# Altium PCB MAX3738ETG+ MB.PcbDoc
Units mm, origin at the board's own origin, x right, y up, seen from the top; angles counter-clockwise.
Board outline 150 x 150 mm, 2 copper layers (Top Layer, Bottom Layer); 32 components, 21 nets, 189 pads, 0 vias.
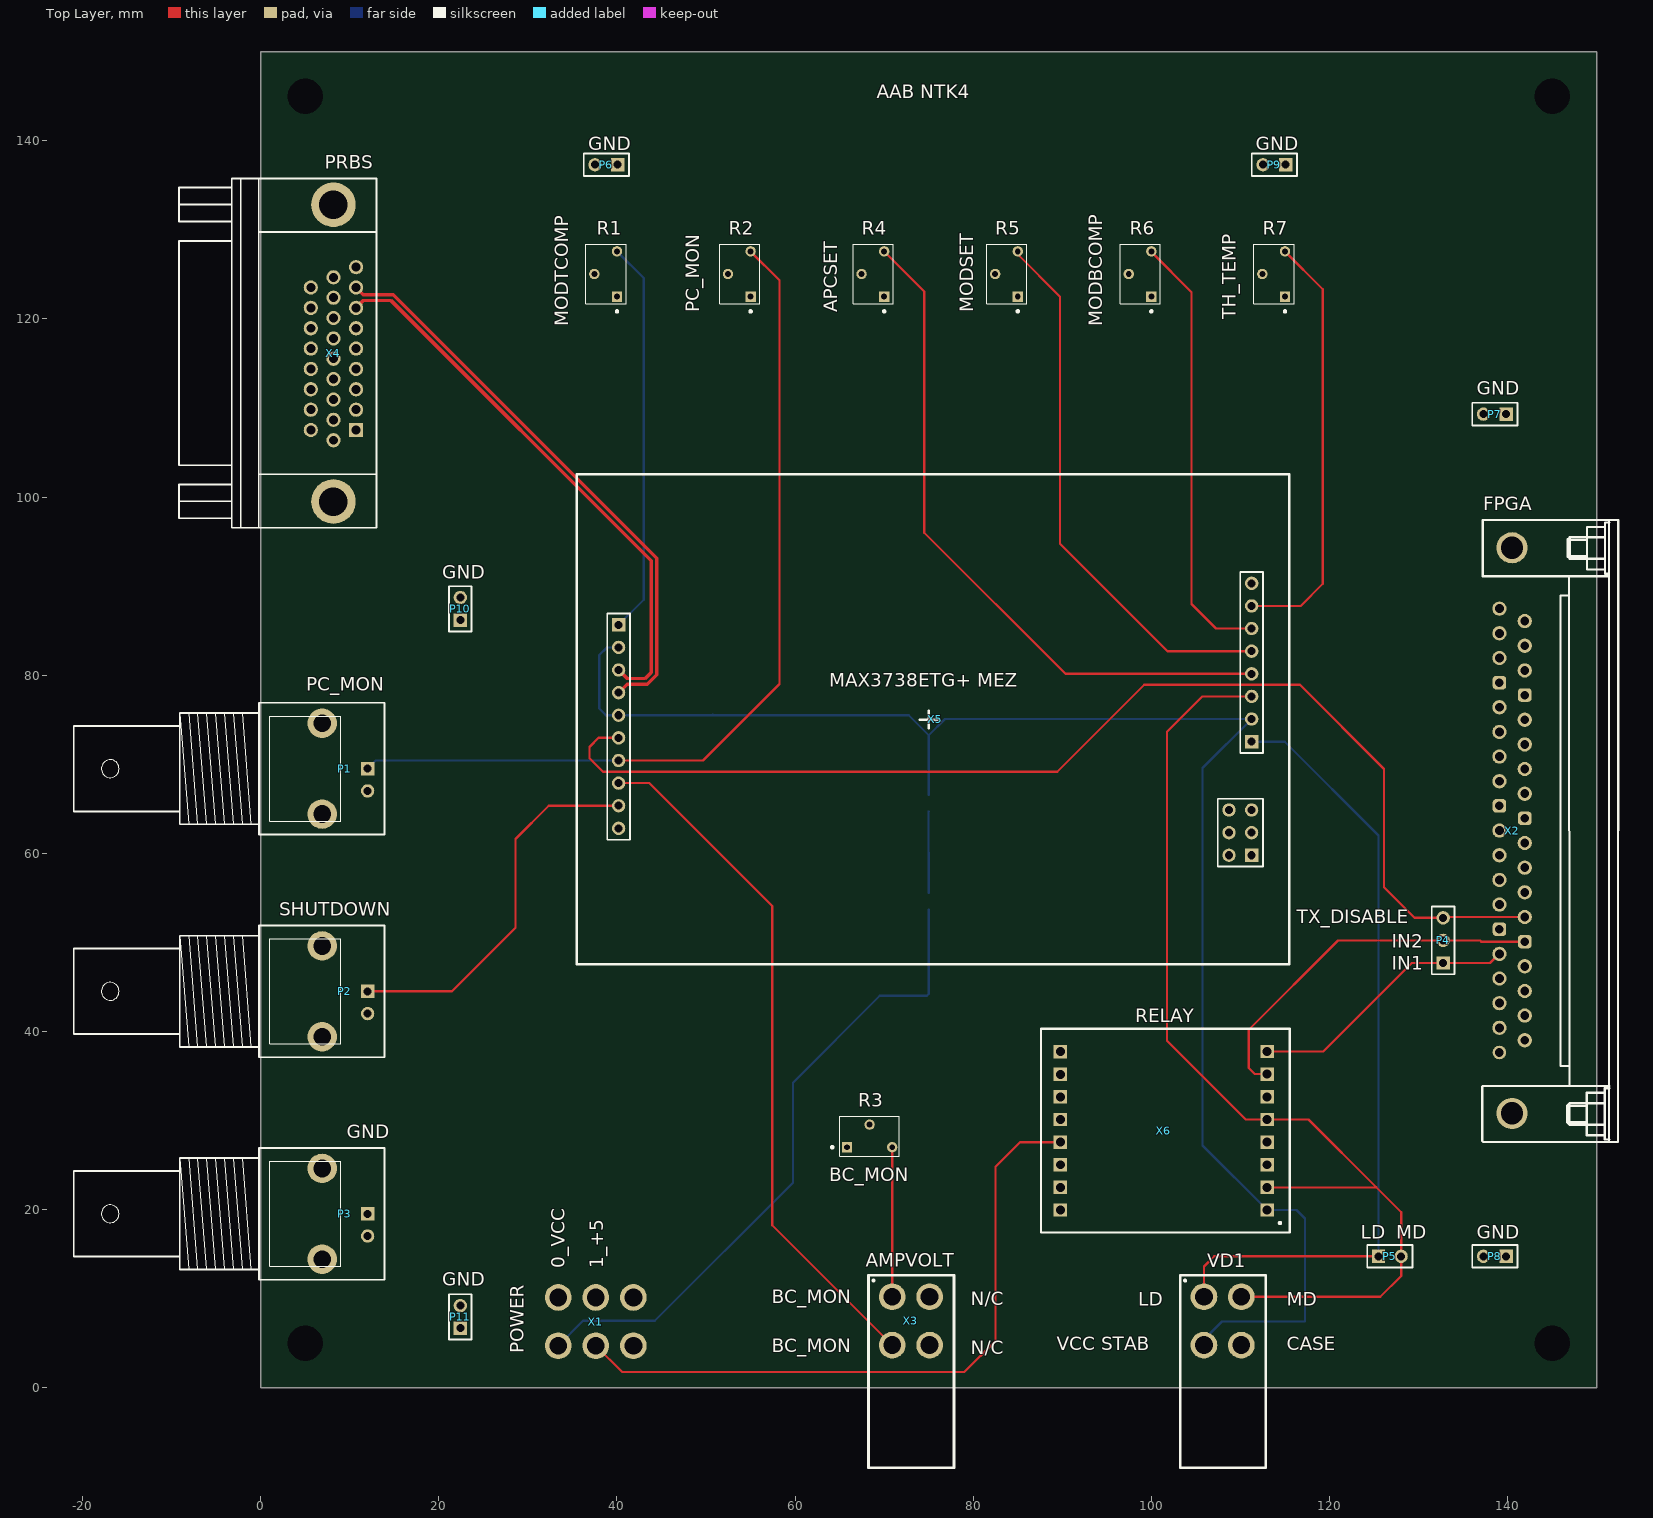
[diagram p0: Top Layer view]
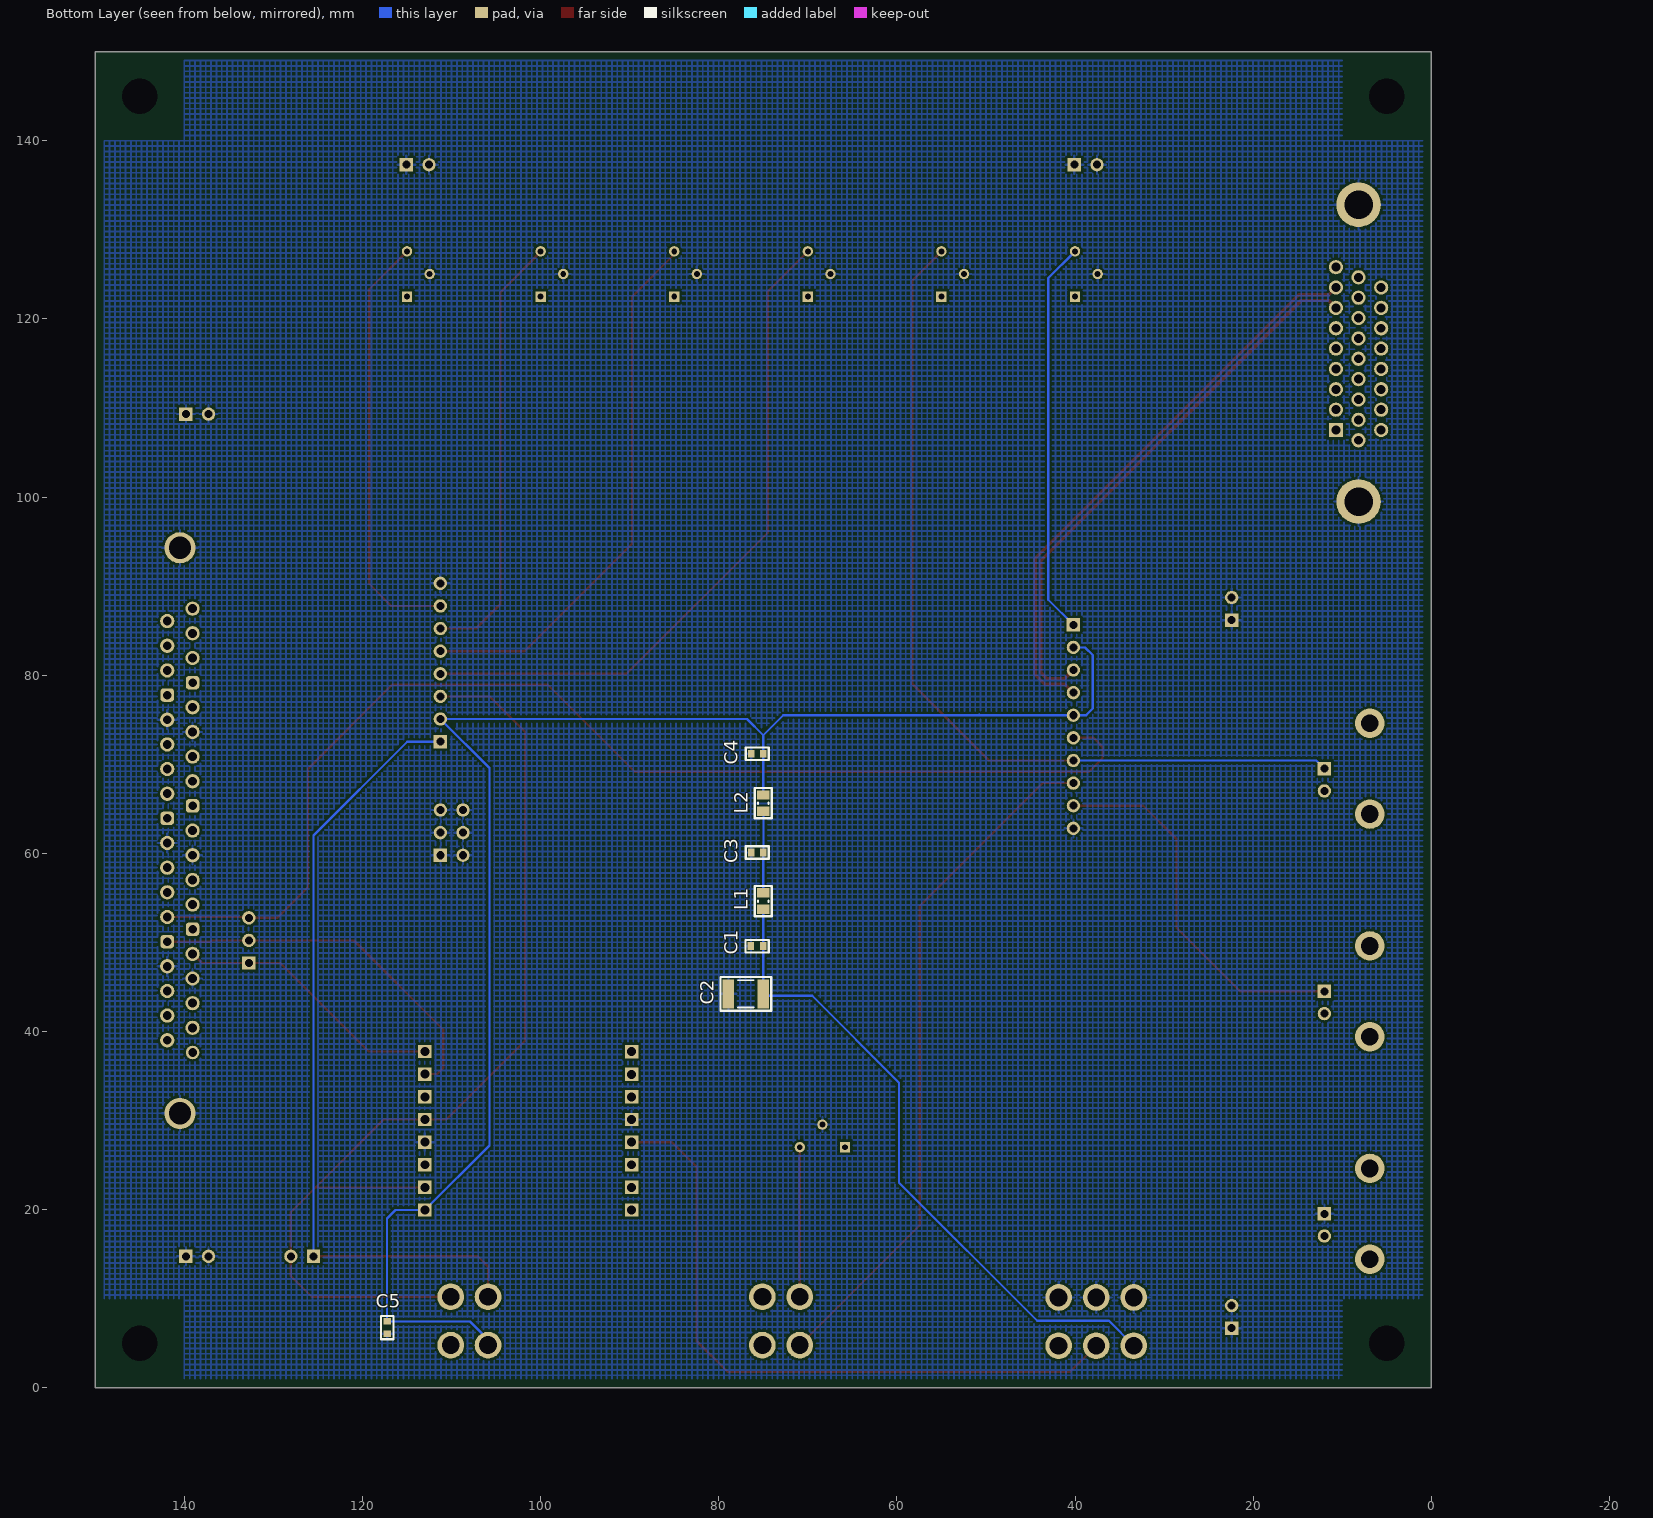
[diagram p1: Bottom Layer view, seen from below]

## Layer stack, top to bottom
Top Solder: solder mask 0.0102, Solder Resist, Dk 3.5
Top Layer: signal copper 0.0356
Dielectric 1: dielectric 0.32, FR-4, Dk 4.8
Bottom Layer: signal copper 0.0356
Bottom Solder: solder mask 0.0102, Solder Resist, Dk 3.5

## Board outline
0,0 150,0 150,150 0,150

## Design rules (kind name [scope] priority, off if disabled: settings)
Clearance [All] p1: gap=0.254 ignorepadtopadclearanceinfootprint=FALSE except(0: Arc-Hole Track-Hole SMDPad-Hole THPad-Hole Via-Hole Fill-Hole Poly-Hole Region-Hole Text-Hole)
DiffPairsRouting [All] p1: maxlimit=0.254 minlimit=0.254 mostfreqgap=0.254 toplayer_minwidth=0.381 toplayer_maxwidth=0.381 toplayer_prefwidth=0.381 bottomlayer_minwidth=0.381 bottomlayer_maxwidth=0.381 bottomlayer_prefwidth=0.381 maxuncoupledlength=12.7
HoleSize [All] p1: absolutevalues=TRUE maxlimit=4 minlimit=0.4 maxpercent=80.000 minpercent=20.000
PolygonConnect [All] p1: connectstyle=Relief reliefconductorwidth=0.254 reliefentries=4 polygonreliefangle="90 Angle" airgapwidth=0.254
RoutingVias [All] p1: holewidth=0.4 width=1.27 viastyle="Through Hole" minholewidth=0.4 minwidth=0.8 maxholewidth=4 maxwidth=6
SilkToSilkClearance [All] p1: silktosilkclearance=0.127
SilkToSolderMaskClearance [IsPad] p1: minsilkscreentomaskgap=0.127 clearancetoexposedcopper=TRUE
SolderMaskExpansion [All] p1: expansion=0.102
UnRoutedNet [All] p1: checkbadconnections=TRUE
Width [All] p1: maxlimit=0.254 minlimit=0.254 preferedwidth=0.254
25 further rules are at their usual default settings.

## Classes and differential pairs
differential pair PRBS: +PRBS_P -PRBS_N

## Components (designator, comment, footprint, x,y, rotation, side; value= is the part's Value field where it differs from the comment)
C1 "0,1uF_0603" CAP_0603 75.7,49.573 r180 bottom
C2 "10uF_1812" CAP_1812 76.96,44.217 r180 bottom
C3 "0,1uF_0603" CAP_0603 75.675,60.098 r180 bottom
C4 "0,1uF_0603" CAP_0603 75.675,71.173 r180 bottom
C5 "0,01uF_0603" CAP_0603 117.223,6.75 r90 bottom
L1 "4,7uH" IND_0805 75.002,54.625 r90 bottom
L2 "4,7uH" IND_0805 75.002,65.625 r90 bottom
P1 "BNC" "BNC_RA CON" 12,69.5 r0 top
P2 "BNC" "BNC_RA CON" 12,44.5 r0 top
P3 "BNC" "BNC_RA CON" 12,19.525 r0 top
P4 "Header 3" HDR1X3 132.759,47.676 r90 top
P5 "Header 2" HDR1X2 125.5,14.75 r0 top
P6 "Header 2" HDR1X2 40.074,137.31 r180 top
P7 "Header 2" HDR1X2 139.824,109.309 r180 top
P8 "Header 2" HDR1X2 139.824,14.75 r180 top
P9 "Header 2" HDR1X2 115.074,137.31 r180 top
P10 "Header 2" HDR1X2 22.409,86.176 r90 top
P11 "Header 2" HDR1X2 22.409,6.676 r90 top
R1 "RES 3266W" "RES 3266W" 40,122.5 r90 top
R2 "RES 3266W" "RES 3266W" 55,122.5 r90 top
R3 "RES 3266W" "RES 3266W" 65.82,27 r0 top
R4 "RES 3266W" "RES 3266W" 70,122.5 r90 top
R5 "RES 3266W" "RES 3266W" 85,122.5 r90 top
R6 "RES 3266W" "RES 3266W" 100,122.5 r90 top
R7 "RES 3266W" "RES 3266W" 115,122.5 r90 top
VD1 "LD with MD" AMP_VOLTMETER 105.9,10.2 r0 top
X1 "POWER" POWER 41.84,10.135 r180 top
X2 "CHEAP_CON_37_FEMALE" CHEAP_CONN_FEMALE 140.5,94.3 r270 top
X3 "AMPVOLT" AMP_VOLTMETER 70.9,10.2 r0 top
X4 "DHR-26F" DHR-26F 8.167,132.82 r180 top
X5 "MAX3738ETG+ MEZ" "MAX3738ETG+ MEZ" 75,75 r0 top
X6 "RELAY" RELAY_MODULE 113,37.75 r180 top

## Footprints (in the part's own frame and the unit in brackets; to place one, negate y for a bottom-side part, rotate by r counter-clockwise, add the part's x,y. Pads: shape width x height; smd on the part's side, far side on the other; paste and mask are expansions set on the pad)
AMP_VOLTMETER [mm] "AMP_VOLTMETER"
  round 3 hole 2: 1(0,0) 2(0,-5.423) 3(4.2,-5.423) 4(4.2,0)
  silkscreen extent -2.66,-19.17 6.94,2.42
"BNC_RA CON" [mm] "Connector; BNC Elbow"
  rect 1.5x1.5 hole 0.9: 1(0,0)
  round 3.3 hole 2: 2(-5.1,-5.1) 2(-5.1,5.1)
  round 1.5 hole 0.9: 2(0,-2.5)
  silkscreen extent -33,-7.4 1.9,7.4
CAP_0603 [mm]
  rect 0.72x0.88 smd: 1(-0.69,0) 2(0.69,0)
  silkscreen extent -1.3,-0.7 1.3,0.7, body extent -0.8,-0.4 0.8,0.4, height 0.9
CAP_1812 [mm]
  rect 1.3x3.25 smd: 1(-1.95,0) 2(1.95,0)
  silkscreen extent -2.85,-1.9 2.85,1.9, body extent -2.25,-1.6 2.25,1.6, height 2
CHEAP_CONN_FEMALE [mm] "CHEAP_CONN_FEMALE"
  round 1.6 hole 1: 1(6.833,-1.422) 2(9.601,-1.422) 3(12.37,-1.422) 5(17.907,-1.422) 6(20.676,-1.422) 7(23.444,-1.422) 8(26.213,-1.422) 10(31.75,-1.422) 11(34.519,-1.422) 12(37.287,-1.422) 13(40.056,-1.422) 15(45.593,-1.422) 16(48.362,-1.422) 17(51.13,-1.422) 18(53.899,-1.422) 20(8.23,1.422) 21(10.998,1.422) 22(13.767,1.422) 24(19.304,1.422) 25(22.073,1.422) 26(24.841,1.422) 27(27.61,1.422) 29(33.147,1.422) 30(35.916,1.422) 31(38.684,1.422) 32(41.453,1.422) 34(46.99,1.422) 35(49.759,1.422) 36(52.527,1.422) 37(55.296,1.422)
  rrect50% 1.524x1.524 hole 0.965: 4(15.138,-1.422) 9(28.981,-1.422) 14(42.824,-1.422) 23(16.535,1.422) 28(30.378,1.422) 33(44.221,1.422)
  round 1.524 hole 0.965: 19(56.667,-1.422)
  round 3.5 hole 2.5: 38(0,0) 39(63.5,0)
  silkscreen extent -3.11,-3.36 66.72,11.92
DHR-26F [mm]
  rect 1.6x1.6 hole 1: 1(-2.54,25.298)
  round 1.6 hole 1: 2(-2.54,23.012) 3(-2.54,20.726) 4(-2.54,18.44) 5(-2.54,16.154) 6(-2.54,13.868) 7(-2.54,11.582) 8(-2.54,9.296) 9(-2.54,7.01) 10(0,26.441) 11(0,24.155) 12(0,21.869) 13(0,19.583) 14(0,17.297) 15(0,15.011) 16(0,12.725) 17(0,10.439) 18(0,8.153) 19(2.54,25.298) 20(2.54,23.012) 21(2.54,20.726) 22(2.54,18.44) 23(2.54,16.154) 24(2.54,13.868) 25(2.54,11.582) 26(2.54,9.296)
  round 5 hole 3.2: 27(0,0) 28(0,33.325)
  silkscreen extent -4.83,-2.94 17.33,36.26, body extent -3.81,-2.94 17.59,36.2, height 12.47
HDR1X2 [mm] "Connector; Header; 2 Position"
  rect 1.5x1.5 hole 0.9: 1(0,0)
  round 1.5 hole 0.9: 2(2.54,0)
  silkscreen extent -1.27,-1.27 3.81,1.27
HDR1X3 [mm] "Connector; Header; 3 Position"
  rect 1.5x1.5 hole 0.9: 1(0,0)
  round 1.5 hole 0.9: 2(2.54,0) 3(5.08,0)
  silkscreen extent -1.27,-1.27 6.35,1.27
IND_0805 [mm]
  rect 1.05x1.4 smd: 1(-0.925,0) 2(0.925,0)
  silkscreen extent -1.7,-0.95 1.7,0.95, body extent -1.1,-0.7 1.1,0.7, height 1
"MAX3738ETG+ MEZ" [mm]
  rect 1.5x1.5 hole 0.9: 1(-34.818,10.658) 11(36.255,-2.468) 19(36.254,-15.221)
  round 1.5 hole 0.9: 2(-34.818,8.118) 3(-34.818,5.578) 4(-34.818,3.038) 5(-34.818,0.498) 6(-34.818,-2.042) 7(-34.818,-4.582) 8(-34.818,-7.122) 9(-34.818,-9.662) 10(-34.818,-12.202) 12(36.255,0.072) 13(36.255,2.612) 14(36.255,5.152) 15(36.255,7.692) 16(36.255,10.232) 17(36.255,12.772) 18(36.255,15.312) 20(36.254,-12.681) 21(36.254,-10.141) 22(33.714,-15.221) 23(33.714,-12.681) 24(33.714,-10.141)
  silkscreen extent -39.52,-27.46 40.48,27.54
POWER [mm] "POWER"
  round 3 hole 2: 1(8.435,5.422) 2(4.217,5.422) 3(0,5.422) 4(8.435,0) 5(4.217,0) 6(0,0)
RELAY_MODULE [mm]
  rect 1.5x1.5 hole 1: 1(0,17.805) 2(0,15.265) 3(0,12.725) 4(0,10.185) 5(0,7.645) 6(0,5.105) 7(0,2.54) 8(0,0) 9(23.216,0.025) 10(23.216,2.565) 11(23.216,5.105) 12(23.216,7.645) 13(23.216,10.185) 14(23.216,12.725) 15(23.216,15.265) 16(23.216,17.805)
  silkscreen extent -2.54,-2.54 25.4,20.32
"RES 3266W" [mm]
  rect 1.168x1.168 hole 0.66: 1(0,0)
  round 1.168 hole 0.66: 2(2.54,2.54) 3(5.08,0)
  silkscreen extent -1.76,-1.02 5.89,3.48, body extent -0.81,-1.02 5.9,3.48, height 8.77

## Part data
C1 C2 C3 C4 C5: library part CAP
L1 L2: library part IND
P1 P2 P3: "BNC Elbow Connector", LatestRevisionDate=17-Jul-2002, LatestRevisionNote="Re-released for DXP Platform.", Publisher="Altium Limited"
P4: "Header, 3-Pin", LatestRevisionDate=17-Jul-2002, LatestRevisionNote="Re-released for DXP Platform.", Publisher="Altium Limited"
P5 P6 P7 P8 P9 P10 P11: "Header, 2-Pin", LatestRevisionDate=17-Jul-2002, LatestRevisionNote="Re-released for DXP Platform.", Publisher="Altium Limited"
X3: library part AMP_VOLTMETER
X6: library part MEZON_RELAY

## Free pads (board coordinates)
  round 3 hole 4 unplated: 0(5,145) 0(5,5) 0(145,5) 0(145,145)

## Nets (pads, with @x,y where several pads share a name; then routed paths per layer and width w, separated by ;. In a path a pad name is that pad's centre, name@x,y a point inside that pad or via, vN(x,y) a via of type N, cw(c..) or ccw(c..) an arc to the next point about the centre after c; other vN are vias at no path point)
+5: X1.2 X6.13 | length 75.5
  Top Layer w0.254: X1.2 40.585,1.75 79,1.75 82.5,5.25 82.5,24.814 85.25,27.564 X6.13
APCSET: R4.3 X5.14 | length 76.8
  Top Layer w0.254: R4.3 74.5,123.08 74.5,96 90.348,80.152 X5.14
BC_MON: X3.2 X5.8 | length 77.8
  Top Layer w0.254: X5.8 43.622,67.878 57.427,54.073 57.427,18.25 X3.2
GND: C1.1 C2.1 C3.1 C4.1 C5.1 P3.1 P6.1 P6.2 P7.1 P7.2 P8.1 P8.2 P9.1 P9.2 P10.1 P10.2 P11.1 P11.2 R1.2 R2.2 R3.2 R4.2 R5.2 R6.2 R7.2 X1.4 X1.5 X1.6 X2.6 X2.11 X2.16 X2.24 X2.29 X2.34 X2.38 X2.39 X4.27 X4.28 X5.10 X5.18 X5.19 X5.20 X5.21 X5.22 X5.23 X5.24 X6.4 X6.12
IN1: P4.1 X2.15 X6.8 | length 30.6
  Top Layer w0.254: X6.8 119.3,37.75 129.226,47.676 P4.1 138.026,47.676 139.057,48.707 X2.15
IN2: P4.2 X2.33 X6.7 | length 41.9
  Top Layer w0.254: X6.7 111.6,35.21 110.925,35.885 110.925,40.175 120.966,50.216 P4.2 136.909,50.216 137.046,50.079 X2.33
LD: P5.1 VD1.1 X5.11 | length 89.3
  Top Layer w0.254: VD1.1 105.9,13.6 107.05,14.75 120,14.75 ; 120,14.75 P5.1
  Bottom Layer w0.254: X5.11 114.968,72.532 125.5,62 P5.1
MD: P5.2 VD1.4 X5.13 X6.2 X6.5 | length 118.4
  Top Layer w0.254: VD1.4 125.7,10.2 128.04,12.54 P5.2 128.04,19.71 125.25,22.5 ; X5.13 105.712,77.612 101.75,73.65 101.75,38.958 110.604,30.104 X6.5 117.646,30.104 125.25,22.5 ; X6.2 125.234,22.484 125.25,22.5
MODBCOMP: R6.3 X5.16 | length 49.3
  Top Layer w0.254: R6.3 100,127.5 104.5,123 104.5,88 107.268,85.232 X5.16
MODSET: R5.3 X5.15 | length 61.3
  Top Layer w0.254: R5.3 85,127.25 89.75,122.5 89.75,94.75 101.808,82.692 X5.15
MODTCOMP: R1.3 X5.1 | length 44.3
  Bottom Layer w0.254: R1.3 43,124.58 43,88.476 X5.1
NetC3_2: C3.2 L1.2 L2.1 | length 9.2
  Bottom Layer w0.254: L1.2 75.002,60.081 C3.2 74.985,64.683 L2.1
NetR3_3: R3.3 X3.1 | length 16.8
  Top Layer w0.254: X3.1 R3.3
PC_MON: P1.1 R2.3 X5.7 | length 100.1
  Top Layer w0.254: X5.7 49.668,70.418 58.25,79 58.25,124.33 R2.3
  Bottom Layer w0.254: P1.1 12.918,70.418 X5.7
PRBS_N: X4.8 X5.4 | length 64.5
  Top Layer w0.381: X4.8 11.532,122.698 14.888,122.698 44.46,93.127 44.46,80.037 43.413,78.99 41.134,78.99 X5.4
PRBS_P: X4.7 X5.3 | length 62.4
  Top Layer w0.381: X4.7 11.532,122.063 14.625,122.063 43.825,92.863 43.825,80.3 43.15,79.625 41.134,79.625 X5.3
SHUTDOWN: P2.1 X5.9 | length 42.7
  Top Layer w0.254: P2.1 21.475,44.5 28.6,51.625 28.6,61.6 32.338,65.338 X5.9
TH_TEMP: R7.3 X5.17 | length 48.1
  Top Layer w0.254: X5.17 116.772,87.772 119.25,90.25 119.25,123.33 R7.3
TX_DISABLE: P4.3 X2.32 X5.6 | length 133.3
  Top Layer w0.254: X5.6 37.933,72.958 36.9,71.925 36.9,70.675 38.425,69.15 89.425,69.15 99.2,78.925 116.675,78.925 126.125,69.475 126.125,56.175 129.544,52.756 P4.3 132.85,52.847 X2.32
VCC: C1.2 C2.2 L1.1 X1.1 | length 74
  Bottom Layer w0.254: X1.1 36.192,7.5 44.25,7.5 59.75,23 59.75,34.25 69.5,44 74.793,44 C2.2 C1.2 75.01,53.692 L1.1
"VCC STAB": C4.2 C5.2 L2.2 VD1.2 X5.2 X5.5 X5.12 X6.1 | length 179.9
  Bottom Layer w0.254: X5.2 38.868,83.118 38,82.25 38,76.25 38.752,75.498 X5.5 50.75,75.498 ; 50.75,75.55 50.75,75.498 ; L2.2 75.002,73.252 ; VD1.2 105.9,5.4 107.94,7.44 C5.2 ; C5.2@117.25,7.44 117.25,19 116.306,19.944 X6.1 105.75,27.194 105.75,69.567 X5.12 76.822,75.072 75.002,73.252 ; 50.75,75.498 72.756,75.498 75.002,73.252
pads on no net: P1.2 P2.2 P3.2 R1.1 R2.1 R3.1 R4.1 R5.1 R6.1 R7.1 VD1.3 X1.3 X2.1 X2.2 X2.3 X2.4 X2.5 X2.7 X2.8 X2.9 X2.10 X2.12 X2.13 X2.14 X2.17 X2.18 X2.19 X2.20 X2.21 X2.22 X2.23 X2.25 X2.26 X2.27 X2.28 X2.30 X2.31 X2.35 X2.36 X2.37 X3.3 X3.4 X4.1 X4.2 X4.3 X4.4 X4.5 X4.6 X4.9 X4.10 X4.11 X4.12 X4.13 X4.14 X4.15 X4.16 X4.17 X4.18 X4.19 X4.20 X4.21 X4.22 X4.23 X4.24 X4.25 X4.26 X6.3 X6.6 X6.9 X6.10 X6.11 X6.14 X6.15 X6.16

## Polygon pours and split planes (outlines as drawn)
GND on Bottom Layer "GND_L02_P062" (hatched 90Degree grid 0.6 track 0.2, pour order 62): 10,140 10,149 140,149 140,140 149,140 149,10 140,10 140,1 10,1 10,10 1,10 1,140
GND on Bottom Layer "GND_L02_P054" (hatched 90Degree grid 0.75 track 0.254, remove dead copper, pour order 54): 10,140
GND on Bottom Layer "GND_L02_P048" (hatched 90Degree grid 0.75 track 0.254, remove dead copper, pour order 48): 7.5,140
GND on Bottom Layer "GND_L02_P044" (hatched 90Degree grid 0.75 track 0.254, remove dead copper, pour order 44): 10,140
GND on Bottom Layer "GND_L02_P042" (hatched 90Degree grid 0.75 track 0.254, remove dead copper, pour order 42): 7.5,140
VCC on Bottom Layer "VCC_L02_P034" (hatched 90Degree grid 0.75 track 0.254, remove dead copper, pour order 34): 125,163
VCC on Bottom Layer "VCC_L02_P030" (hatched 90Degree grid 0.75 track 0.254, remove dead copper, pour order 30): 7.5,140
GND on Bottom Layer "GND_L02_P026" (hatched 90Degree grid 0.75 track 0.254, remove dead copper, pour order 26): 2.5,10
GND on Bottom Layer "GND_L02_P022" (hatched 90Degree grid 0.75 track 0.254, remove dead copper, pour order 22): 2.5,140
GND on Bottom Layer "GND_L02_P000" (hatched 90Degree grid 0.6 track 0.2, pour order 0): 0,150

## Silkscreen, mask and mechanical layers (free items; w line width, h text height)
Top Overlay:
  text "AAB NTK4" at 69.162,144.8 h1.52
  text "GND" at 36.758,138.95 h1.52
  text "GND" at 111.708,138.95 h1.52
  text "PRBS" at 7.175,136.876 h1.52
  text "PC_MON" at 49.25,120.723 h1.52 r90
  text "APCSET" at 64.75,120.723 h1.52 r90
  text "MODSET" at 80,120.723 h1.52 r90
  text "TH_TEMP" at 109.5,119.962 h1.52 r90
  text "MODTCOMP" at 34.5,119.2 h1.52 r90
  text "MODBCOMP" at 94.5,119.2 h1.52 r90
  text "GND" at 136.527,111.5 h1.52
  text "FPGA" at 137.267,98.5 h1.52
  text "GND" at 20.383,90.8 h1.52
  text "PC_MON" at 5.113,78.25 h1.52
  text "SHUTDOWN" at 2.066,53 h1.52
  text "TX_DISABLE" at 116.3,52.15 h1.52
  text "IN2" at 126.965,49.398 h1.52
  text "IN1" at 126.965,46.9 h1.52
  text "GND" at 9.683,28.025 h1.52
  text "BC_MON" at 63.85,23.2 h1.52
  text "LD" at 123.491,16.725 h1.52
  text "MD" at 127.491,16.725 h1.52
  text "GND" at 136.527,16.725 h1.52
  text "0_VCC" at 34.14,13.4 h1.52 r90
  text "1_+5" at 38.44,13.4 h1.52 r90
  text "GND" at 20.383,11.425 h1.52
  text "BC_MON" at 57.4,9.5 h1.52
  text "N/C" at 79.7,9.246 h1.52
  text "LD" at 98.541,9.2 h1.52
  text "MD" at 115.2,9.2 h1.52
  text "VCC STAB" at 89.4,4.2 h1.52
  text "CASE" at 115.2,4.2 h1.52
  text "BC_MON" at 57.4,4 h1.52
  text "N/C" at 79.7,3.746 h1.52
Mechanical 1:
  the board outline again, w0.254